# Altium PCB BPadapter.PcbDoc
Units mm, origin at the board's own origin, x right, y up, seen from the top; angles counter-clockwise.
Board outline 9.64 x 86.87 mm, 2 copper layers (Top Layer, Bottom Layer), stack 1.571 mm thick; 13 components, 12 nets, 43 pads, 1 vias.
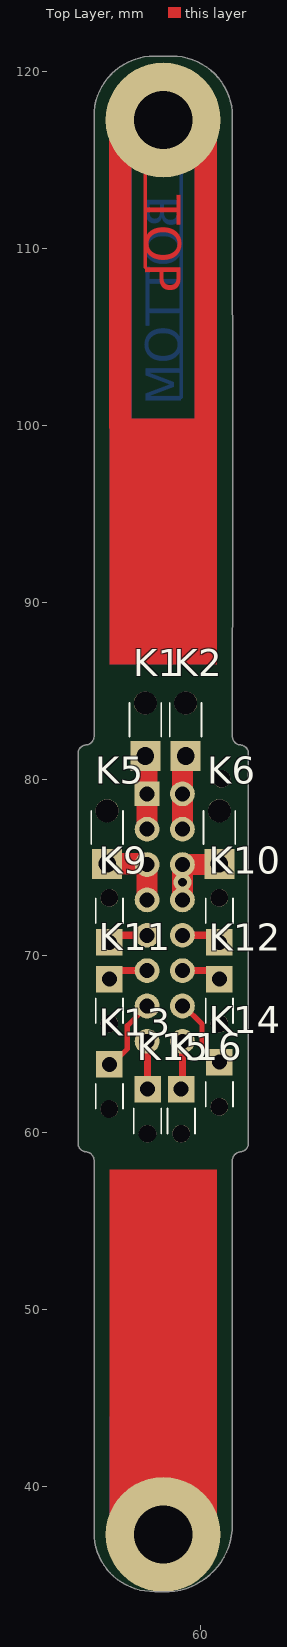
[diagram p0: Top Layer view]
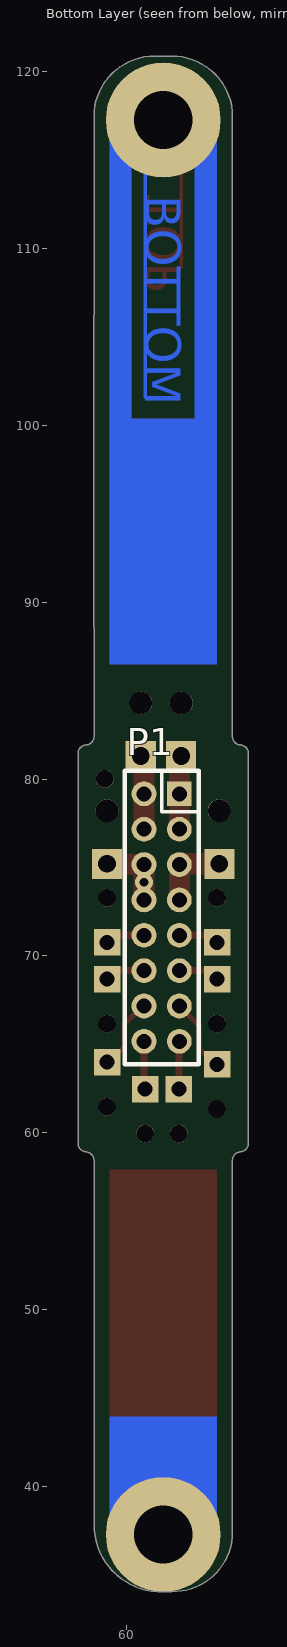
[diagram p1: Bottom Layer view, seen from below]
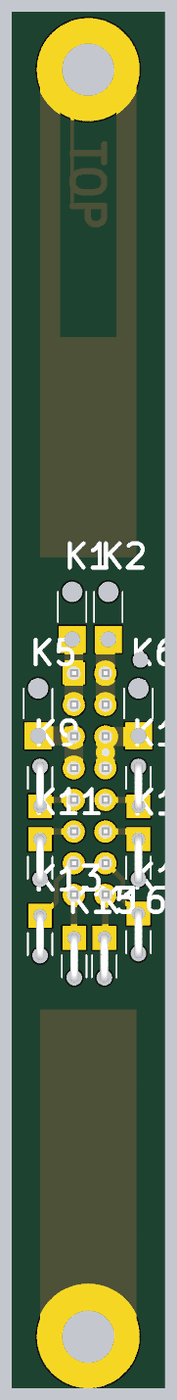
[diagram p2: 3D render of the assembled board from above, using the file's embedded part models]

## Layer stack, top to bottom
Top Layer: signal copper 0.0356
Dielectric 1: core 1.5, FR-4, Dk 4.2
Bottom Layer: signal copper 0.0356

## Board outline
53.996,37.389 53.996,58.42 53.998,58.42 ccw(c53.498,58.42) 53.585,58.912 cw(c53.585,59.412) 53.092,59.326 53.09,59.326 53.09,81.517 cw(c53.583,81.431) 53.583,81.931 ccw(c53.496,82.423) 53.996,82.423 53.996,117.77 cw(c57.421,117.461) 57.421,120.9 58.395,120.9 cw(c58.395,117.461) 61.82,117.77 61.829,94.737 61.823,82.423 ccw(c62.323,82.423) 62.237,81.931 cw(c62.237,81.431) 62.729,81.517 62.729,59.326 62.727,59.326 cw(c62.235,59.412) 62.235,58.912 ccw(c62.321,58.42) 61.821,58.42 61.822,58.42 61.82,50.219 61.822,50.219 61.82,37.824 61.82,37.825 cw(c58.025,37.825) 57.934,34.03 57.934,34.033 57.421,34.045 cw(c57.341,37.389)

## Design rules (kind name [scope] priority, off if disabled: settings)
Clearance [All] p1: gap=0.208 ignorepadtopadclearanceinfootprint=FALSE except(0: Arc-Hole Track-Hole SMDPad-Hole THPad-Hole Via-Hole Fill-Hole Poly-Hole Region-Hole Text-Hole)
ComponentClearance ComponentClearance_1 [InComponent('H1') vs InComponent('H2')] p1: gap=-100 collisioncheckmode=3 verticalgap=-100 showdistances=FALSE
ComponentClearance [All] p2: gap=0.254 collisioncheckmode=3 verticalgap=0.254 showdistances=FALSE
PolygonConnect [All] p1: connectstyle=Relief reliefconductorwidth=0.254 reliefentries=4 polygonreliefangle="90 Angle" airgapwidth=0.254
RoutingVias [All] p1: holewidth=0.711 width=1.27 viastyle="Through Hole" minholewidth=0.711 minwidth=1.27 maxholewidth=0.711 maxwidth=1.27
SolderMaskExpansion [All] p1: expansion=0.102
Width [All] p1: maxlimit=4 minlimit=0.208 preferedwidth=0.254 minimp=50.000000 maximp=50.000000 favimp=50.000000
29 further rules are at their usual default settings.

## Components (designator, comment, footprint, x,y, rotation, side; value= is the part's Value field where it differs from the comment)
K1 "VBAT" wire-awg24-1_stress-relief 56.896,82.804 r90 top
K2 "VBAT" wire-awg24-1_stress-relief 59.182,82.804 r90 top
K5 "GND" wire-awg24-1_stress-relief 54.737,76.708 r90 top
K6 "GND" wire-awg24-1_stress-relief 61.087,76.708 r90 top
K9 "MISO" wire-awg26-1_stress-relief 54.864,72.263 r90 top
K10 "MOSI" wire-awg26-1_stress-relief 61.087,72.263 r90 top
K11 "VCC" wire-awg26-1_stress-relief 54.864,67.183 r270 top
K12 "SCK" wire-awg26-1_stress-relief 61.087,67.183 r270 top
K13 "CS1" wire-awg26-1_stress-relief 54.864,62.357 r270 top
K14 "CS2" wire-awg26-1_stress-relief 61.087,62.484 r270 top
K15 "CS1" wire-awg26-1_stress-relief 57.023,60.96 r270 top
K16 "HS" wire-awg26-1_stress-relief 58.928,60.96 r270 top
P1 "Samtec_TW-08-03-T-D-200-120" Samtec_TW-08-03-T-D-200-120 56.996,79.165 r90 bottom locked value="Samtec TW-08-03-T-D-200-120"

## Footprints (in the part's own frame and the unit in brackets; to place one, negate y for a bottom-side part, rotate by r counter-clockwise, add the part's x,y. Pads: shape width x height; smd on the part's side, far side on the other; paste and mask are expansions set on the pad)
Samtec_TW-08-03-T-D-200-120 [mm] "Header. Samtec_SQW-108-01-L-D. 2mm pitch, 2x8pin, male, THT."
  rect 1.4x1.4 hole 0.85: 1(0,0)
  round 1.4 hole 0.85: 2(0,2) 3(-2,0) 4(-2,2) 5(-4,0) 6(-4,2) 7(-6,0) 8(-6,2) 9(-8,0) 10(-8,2) 11(-10,0) 12(-10,2) 13(-12,0) 14(-12,2) 15(-14,0) 16(-14,2)
  silkscreen extent -15.3,-1.1 1.3,3.1, body extent -14.98,-0.98 1.02,3.02, height 10.54
wire-awg24-1_stress-relief [mm] "Single wire AWG24 solder point with a stress relief."
  round 1.3 hole 1.3 unplated: 0(1.5,0)
  rect 1.7x1.7 hole 1: 1(-1.5,0)
  silkscreen extent -0.4,-0.9 1.5,0.9
wire-awg26-1_stress-relief [mm] "Single wire AWG26 solder point with a stress relief."
  round 1 hole 1 unplated: 0(1.017,0)
  rect 1.5x1.5 hole 0.85: 1(-1.5,0)
  silkscreen extent -0.4,-0.78 1,0.78, body extent -1.75,-0.25 1.29,0.25, height 3.23

## Part data
K1 K2 K5 K6: library part wire-awg24-1, "Single wire AWG24 solder point."
K9 K10 K11 K12 K13 K14 K15 K16: library part wire-awg26-1, "Single wire AWG26 solder point."
P1: "Samtec TW Series Header, 2mm pitch, 2x8pin.", HelpUrl=http://suddendocs.samtec.com/catalog_english/tw_th.pdf

## Free pads (board coordinates)
  round 6.5 hole 3.3: 1(57.908,37.269) 1(57.908,117.279)
  round 1 hole 1 unplated: 2(61.214,80.01)

## Via types
v1: diameter 1, hole 0.5, Top Layer to Bottom Layer, 1 vias

## Nets (pads, with @x,y where several pads share a name; then routed paths per layer and width w, separated by ;. In a path a pad name is that pad's centre, name@x,y a point inside that pad or via, vN(x,y) a via of type N, cw(c..) or ccw(c..) an arc to the next point about the centre after c; other vN are vias at no path point)
NetK1_1: K1.1 P1.1 P1.3 | length 4.2
  Top Layer w1.2: K1.1 56.996,81.204 P1.1 P1.3
NetK2_1: K2.1 P1.2 P1.4 | length 4.1
  Top Layer w1.2: P1.4 P1.2 K2.1@58.996,81.28
NetK5_1: K5.1 P1.5 P1.7 | length 4.1
  Top Layer w1.2: K5.1@54.864,75.208 56.953,75.208 P1.5 P1.7
NetK6_1: K6.1 P1.6 P1.8 | length 4
  Top Layer w1.2: P1.8 v1(58.996,74.165) P1.6 60.917,75.165 K6.1@60.96,75.208
NetK9_1: K9.1 P1.9 | length 2.2
  Top Layer w0.3: K9.1@54.991,70.636 K9.1@55.52,71.165
  Top Layer w0.4: K9.1@55.52,71.165 P1.9
NetK10_1: K10.1 P1.10 | length 2.2
  Top Layer w0.3: K10.1@60.431,71.165 K10.1@60.96,70.636
  Top Layer w0.4: P1.10 K10.1@60.431,71.165
NetK11_1: K11.1 P1.11 | length 2.1
  Top Layer w0.4: K11.1@54.864,69.165 P1.11
NetK12_1: K12.1 P1.12 | length 1.8
  Top Layer w0.4: P1.12 K12.1@60.833,69.165
NetK13_1: K13.1 P1.13 | length 4.1
  Top Layer w0.3: K13.1@54.991,63.857 55.88,64.746 55.88,66.049 P1.13
NetK14_1: K14.1 P1.14 | length 4
  Top Layer w0.3: P1.14 59.073,67.165 60.102,66.136 60.102,64.842 K14.1@60.96,63.984
NetK15_1: K15.1 P1.15 | length 2.7
  Top Layer w0.4: P1.15 57.023,65.138 K15.1
NetK16_1: K16.1 P1.16 | length 2.7
  Top Layer w0.3: K16.1 K16.1@58.996,62.528
  Top Layer w0.4: K16.1@58.996,62.528 P1.16
pads on no net: K1.0 K2.0 K5.0 K6.0 K9.0 K10.0 K11.0 K12.0 K13.0 K14.0 K15.0 K16.0
copper on no net: | length 21.1
  Top Layer w0.208: 56.896,108.966 56.896,116.078
  Bottom Layer w0.208: 58.928,101.6 58.928,115.57

## Other copper
Top Layer:
  rectangle: 54.86,86.487 60.956,100.399
  region: 60.952,117.094 59.682,117.094 59.682,100.076 60.952,100.076
  region: 56.126,118.11 54.856,118.11 54.856,99.822 56.126,99.822
  rectangle: 54.864,37.084 60.96,57.912
  text "TOP" at 56.896,113.03 h2 r270
Bottom Layer:
  rectangle: 59.69,99.822 60.96,118.11
  rectangle: 54.864,100.076 56.134,117.094
  region: 60.956,100.399 54.86,100.399 54.86,86.487 60.956,86.487
  region: 60.952,43.942 54.856,43.942 54.856,37.084 60.952,37.084
  text "BOTTOM" at 58.928,113.03 h2 r90

## Silkscreen, mask and mechanical layers (free items; w line width, h text height)
Mechanical 1:
  lines w0.1: 53.09,59.326 53.09,81.517 cw(c53.583,81.431) 53.583,81.931 ccw(c53.496,82.423) 53.996,82.423 53.996,117.77 cw(c57.421,117.461) 57.421,120.9 58.395,120.9 cw(c58.395,117.461) 61.82,117.77 61.829,94.737 61.823,82.423 ccw(c62.323,82.423) 62.237,81.931 cw(c62.237,81.431) 62.729,81.517 62.729,59.326 ; 53.092,59.326 ccw(c53.585,59.412) 53.585,58.912 cw(c53.498,58.42) 53.998,58.42 ; 53.996,58.42 53.996,37.389 ccw(c57.341,37.389) 57.421,34.045 57.934,34.033 ; 57.934,34.03 ccw(c58.025,37.825) 61.82,37.825 61.822,50.219 ; 61.82,50.219 61.822,58.42 cw(c62.321,58.42) 62.235,58.912 ccw(c62.235,59.412) 62.727,59.326